# Altium PCB PCB1.PcbDoc
Units mil, origin at the board's own origin, x right, y up, seen from the top; angles counter-clockwise.
Board outline 10955.05 x 6878.87 mil, 2 copper layers (Top Layer, Bottom Layer); 48 components, 34 nets, 262 pads, 8 vias.
Unrouted connection lines stored in the file: 2.
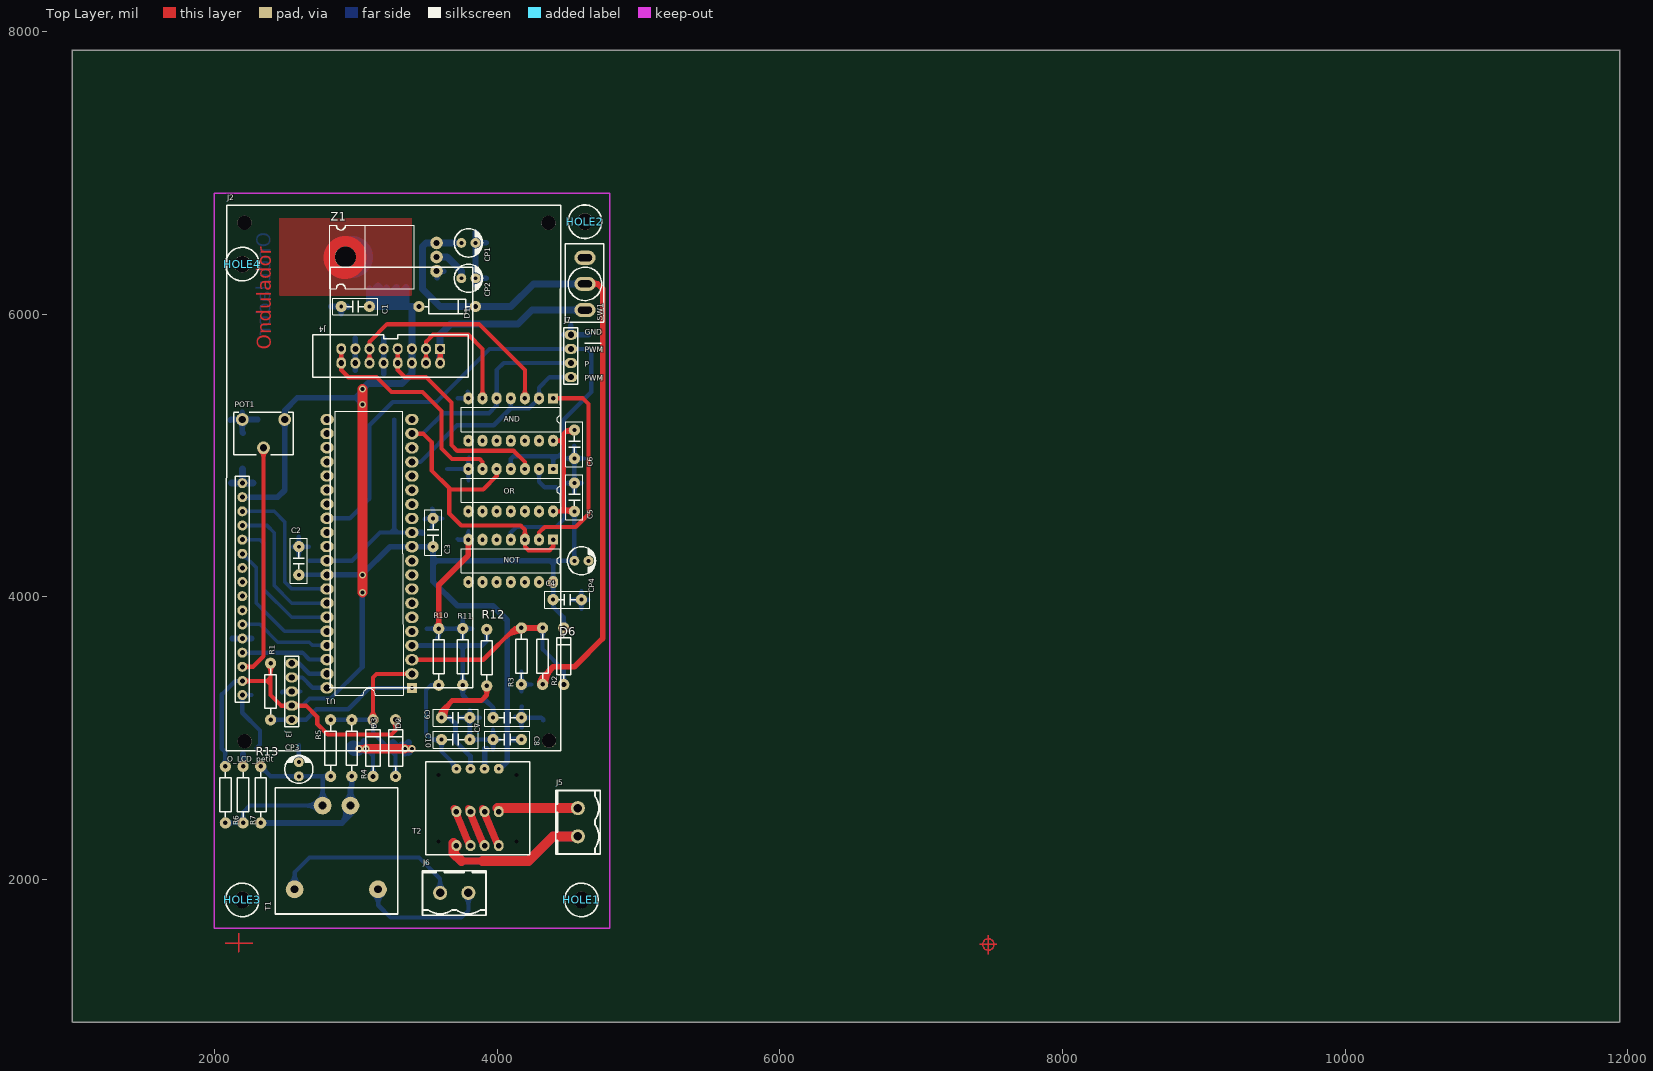
[diagram p0: Top Layer view]
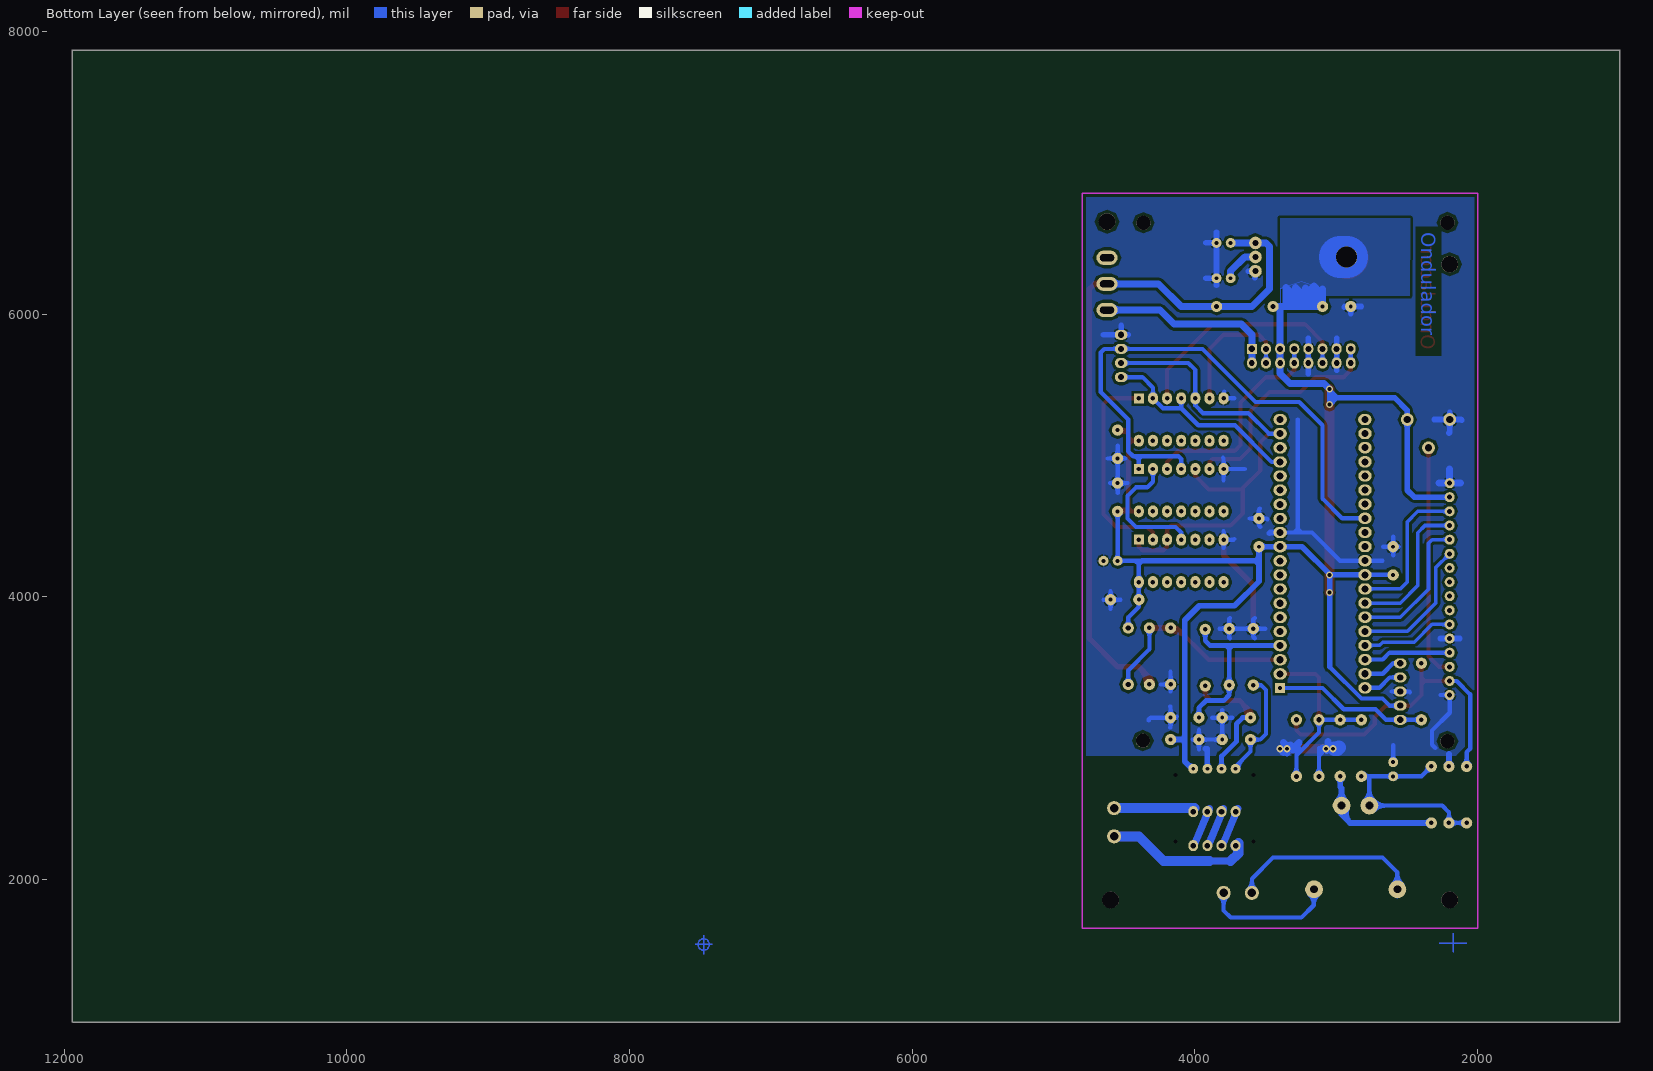
[diagram p1: Bottom Layer view, seen from below]

## Layer stack, top to bottom
Top Solder: solder mask 0.4, Solder Resist, Dk 3.5
Top Layer: signal copper 1.4
Dielectric 1: dielectric 12.6, FR-4, Dk 4.8
Bottom Layer: signal copper 1.4
Bottom Solder: solder mask 0.4, Solder Resist, Dk 3.5

## Board outline
991.18,996.73 cw(c994.98,1000) 989.97,1000 989.97,7865 cw(c994.98,7865) 994.98,7870.02 11940,7870.02 cw(c11940,7865) 11945.01,7865 11945.01,996.16 cw(c11940,996.16) 11940,991.15 996.16,991.15 cw(c996.16,996.16)

## Design rules (kind name [scope] priority, off if disabled: settings)
Clearance [All] p1: gap=20
PolygonConnect [All] p1: connectstyle=Relief reliefconductorwidth=10 reliefentries=4 polygonreliefangle="90 Angle" airgapwidth=10
RoutingVias [All] p1: holewidth=28 width=50 viastyle="Through Hole" minholewidth=28 minwidth=50 maxholewidth=28 maxwidth=50
SolderMaskExpansion [All] p1: expansion=4
UnpouredPolygon [All] p1: allowunpoured=FALSE
Width [All] p1: maxlimit=300 minlimit=15 preferedwidth=35
29 further rules are at their usual default settings.

## Classes and differential pairs
component class Sheet1: AND C1 C2 C3 C4 C5 C6 CP1 CP2 CP3 CP4 D1 D2 D3 D6 HOLE1 HOLE2 HOLE3 HOLE4 J2 J3 J4 J5 J6 J7 NOT OR POT1 R1 R2 R3 R4 R5 R6 R7 R10 R11 R12 SW1 T1 T2 U1 Z1

## Components (designator, comment, footprint, x,y, rotation, side; value= is the part's Value field where it differs from the comment)
AND "I-7408" DIP14 4395,5405 r270 top
C1 "C" C2_200MILS 3095,6055 r180 top
C2 "C" C2_200MILS 2595,4155 r90 top
C3 "C" C2_200MILS 3545,4355 r90 top
C4 "C" C2_200MILS 4395,3980 r0 top
C5 "C" C2_200MILS 4545,4605 r90 top
C6 "C" C2_200MILS 4545,5180 r270 top
C7 "C" C2_200MILS 3970,3145 r0 top
C8 "47nF" C2_200MILS 4170,2990 r180 top
C9 "4.7nF" C2_200MILS 3805,3145 r180 top
C10 "47nF" C2_200MILS 3605,2990 r0 top
CP1 "CP" CP1_D5I5 3745,6505 r0 top
CP2 "CP" CP1_D5I5 3745,6255 r0 top
CP3 "CP" CP1_D5I5 2595,2730 r90 top
CP4 "CP" CP1_D5I5 4545,4255 r0 top
D1 "D" DO41 3445,6055 r0 top
D2 "D" DO41 3280,2730 r90 top
D3 "D" DO41 3120,2730 r90 top
D6 "D" DO41 4470,3380 r90 top
HOLE1 "HOLE" HOLE3_D6 4595,1855 r90 top
HOLE2 "HOLE" HOLE3_D6 4620,6655 r90 top
HOLE3 "HOLE" HOLE3_D6 2195,1855 r90 top
HOLE4 "HOLE" HOLE3_D6 2195,6355 r90 top
J2 "O_LCD_petit" O_LCDPETIT 2195,3305 r90 top locked
J3 "ICSP" CON5_2I54V 2545,3130 r180 top
J4 "CON16_2headers" CON16-2HEADERS 3595,5755 r270 top
J5 "CON2" CON2_5I08V_CP 4570,2505 r270 top
J6 "CON2" CON2_5I08V_CP 3795,1905 r180 top
J7 "CON4" CON4_2I54V 4520,5555 r180 top
NOT "I-7404" DIP14 4395,4405 r270 top
OR "I-7432" DIP14 4395,4905 r270 top
POT1 "10k" PT15V 2495,5255 r180 top
R1 "10k" R1/4 2395,3530 r270 top
R2 "R" R1/4 4320,3380 r90 top
R3 "R" R1/4 4170,3780 r270 top
R4 "120k" R1/4 2970,2730 r90 top
R5 "5k6" R1/4 2820,3130 r270 top
R6 "1k" R1/4 2075,2800 r270 top
R7 "1k" R1/4 2200,2400 r90 top
R10 "220k" R1/4 3585,3775 r270 top
R11 "10k" R1/4 3755,3775 r270 top
R12 "10ohm" R1/4 3925,3770 r270 top
R13 "820ohm" R1/4 2325,2800 r270 top
SW1 "SW" SW1SPDT 4620,6030 r90 top
T1 "TRAFO_1P2S" TR_0.35/1/12 3295,1755 r90 top
T2 "Transducer 5-20A" "HXS 20-NP" 3710,2240 r0 top
U1 "I-PIC18F44K20" DIP40 3395,3355 r180 top
Z1 "Z-78MXX" TO220GDS_pla 3570,6505 r90 top

## Footprints (in the part's own frame and the unit in brackets; to place one, negate y for a bottom-side part, rotate by r counter-clockwise, add the part's x,y. Pads: shape width x height; smd on the part's side, far side on the other; paste and mask are expansions set on the pad)
C2_200MILS [mil]
  round 80 hole 27.56: 1(0,0) 2(200,0)
  silkscreen extent -60,-60 260,60
CON2_5I08V_CP [mm]
  round 2.54 hole 1.5: 1(0,0) 2(5.08,0)
  silkscreen extent -3.15,-4 8.24,4
CON4_2I54V [mm]
  oval 2.286x1.8 hole 1.1: 1(0,0) 2(0,-2.54) 3(0,-5.08) 4(0,-7.62)
  silkscreen extent -1.27,-8.89 1.27,1.27
CON5_2I54V [mm]
  oval 2.286x1.8 hole 1.1: 1(0,0) 2(0,-2.54) 3(0,-5.08) 4(0,-7.62) 5(0,-10.16)
  silkscreen extent -1.27,-11.43 1.27,1.27
CON16-2HEADERS [mil]
  rect 70.87x70.87 hole 47.24: 1(0,0)
  oval 80x70 hole 40: 2(100,0) 4(100,-100) 6(100,-200) 8(100,-300) 10(100,-400) 12(100,-500) 14(100,-600) 15(0,-700) 16(100,-700)
  oval 80x70.87 hole 43.31: 3(0,-100) 5(0,-200) 7(0,-300) 9(0,-400) 11(0,-500) 13(0,-600)
  silkscreen extent -100,-900 200,200
CP1_D5I5 [mil]
  round 70 hole 27.56: 1(0,0) 2(100,0)
  silkscreen extent -50,-100 150,100
DIP14 [mm]
  rect 1.8x1.8 hole 0.8: 1(0,0)
  oval 2.159x1.8 hole 0.8: 2(0,-2.54) 3(0,-5.08) 4(0,-7.62) 5(0,-10.16) 6(0,-12.7) 7(0,-15.24) 8(7.62,-15.24) 9(7.62,-12.7) 10(7.62,-10.16) 11(7.62,-7.62) 12(7.62,-5.08) 13(7.62,-2.54) 14(7.62,0)
  silkscreen extent 1.63,-16.51 5.99,1.27
DIP40 [mm]
  rect 1.8x1.8 hole 0.7: 1(0,0)
  oval 2.413x2.032 hole 1.27: 2(0,-2.54) 3(0,-5.08) 4(0,-7.62) 5(0,-10.16) 6(0,-12.7) 7(0,-15.24) 8(0,-17.78) 9(0,-20.32) 10(0,-22.86) 11(0,-25.4) 12(0,-27.94) 13(0,-30.48) 14(0,-33.02) 15(0,-35.56) 16(0,-38.1) 17(0,-40.64) 18(0,-43.18) 19(0,-45.72) 20(0,-48.26) 21(15.24,-48.26) 22(15.255,-45.745) 23(15.255,-43.205) 24(15.255,-40.665) 25(15.255,-38.125) 26(15.255,-35.585) 27(15.255,-33.045) 28(15.255,-30.505) 29(15.255,-27.965) 30(15.255,-25.425) 31(15.255,-22.885) 32(15.255,-20.345) 33(15.255,-17.805) 34(15.255,-15.265) 35(15.255,-12.725) 36(15.255,-10.185) 37(15.255,-7.645) 38(15.255,-5.105) 39(15.255,-2.565) 40(15.255,-0.025)
  round 1.8 hole 0.7: 2(0,-2.54) 3(0,-5.08) 4(0,-7.62) 5(0,-10.16) 6(0,-12.7) 7(0,-15.24) 8(0,-17.78) 9(0,-20.32) 10(0,-22.86) 11(0,-25.4) 12(0,-27.94) 13(0,-30.48) 14(0,-33.02) 15(0,-35.56) 16(0,-38.1) 17(0,-40.64) 18(0,-43.18) 19(0,-45.72) 20(0,-48.26) 21(15.24,-48.26) 22(15.255,-45.745) 23(15.255,-43.205) 24(15.255,-40.665) 25(15.255,-38.125) 26(15.255,-35.585) 27(15.255,-33.045) 28(15.255,-30.505) 29(15.255,-27.965) 30(15.255,-25.425) 31(15.255,-22.885) 32(15.255,-20.345) 33(15.255,-17.805) 34(15.255,-15.265) 35(15.255,-12.725) 36(15.255,-10.185) 37(15.255,-7.645) 38(15.255,-5.105) 39(15.255,-2.565) 40(15.255,-0.025)
  silkscreen extent 1.58,-49.75 13.78,1.28
DO41 [mil]
  round 80 hole 36: 1(0,0) 2(400,0)
  silkscreen extent 40,-50 360,50
HOLE3_D6 [mm]
  round 3 hole 3 unplated: 1(0,0)
  silkscreen extent -3.02,-3.02 3.02,3.01
"HXS 20-NP" [mm]
  round 0 hole 0.7: 0(-3.19,0.7) 0(-3.19,12.7) 0(10.81,0.7) 0(10.81,12.7)
  oval 1.778x2 hole 1: 1(0,0) 2(0,6.1) 3(2.54,0) 4(2.54,6.1) 5(5.08,0) 6(5.08,6.1) 7(7.62,0) 8(7.62,6.1)
  round 1.778 hole 0.7: 9(7.62,13.8) 10(5.08,13.8) 11(2.54,13.8) 12(0,13.8)
  silkscreen extent -5.54,-1.65 13.16,15.05
O_LCDPETIT [mm]
  round 2.54 hole 2.54 unplated: 0(-8.3,-0.425) 0(-8.2,-55.15) 0(84.9,-55.05) 0(84.915,-0.399)
  round 1.8 hole 0.9: 1(0,0) 2(2.54,0) 3(5.08,0) 4(7.62,0) 5(10.16,0) 6(12.7,0) 7(15.24,0) 8(17.78,0) 9(20.32,0) 10(22.86,0) 11(25.4,0) 12(27.94,0) 13(30.48,0) 14(33.02,0) 15(35.575,0) 16(38.1,0)
  silkscreen extent -10.05,-57.2 88.08,2.85
PT15V [mil]
  round 90 hole 51.18: 1(0,0) 2(150,200) 3(300,0)
  silkscreen extent -59,-51 360,248
R1/4 [mil]
  round 80 hole 32: 1(0,0) 2(400,0)
  silkscreen extent 40,-40 360,40
SW1SPDT [mil]
  oval 100x150 hole 50 slot 100 at 90 deg: 1(0,0) 2(185,0) 3(370,0)
  silkscreen extent -88,-133 470,138
TO220GDS_pla [mm]
  round 2.286 hole 1.1: 1(0,0) 2(-5.08,0) 3(-2.54,0)
  round 3.78 hole 3.78 unplated: 3(-2.54,16.4)
  silkscreen extent -8.2,4 3.16,19.2
TR_0.35/1/12 [mm]
  round 3.2 hole 1.4: 1(4.445,18.542) 2(19.501,13.5) 3(4.445,3.556) 4(19.501,8.5)
  silkscreen extent 0,0 22.7,22

## Part data
AND: "Cuadruple 2 input Schmitt trigger NAND gate"
C1 C2 C3 C4 C5 C6 C7: ";C?;C1206;C2_25x7i5;C4_15x5 ;C0805 ;Condensador baja potencia ;2"
C8 C9 C10: library part C, ";C?;C1206;C2_25x7i5;C4_15x5 ;C0805 ;Condensador baja potencia ;2"
CP1 CP2 CP3 CP4: ";CP? ;CP1_D5i5 ;CP2_D10i5 ;CP2_D13 ;CP4_D36 ;Condensador polarizado ;3"
D1 D2 D3 D6: ";D? ;SOD80;DO41 ;melf ;minimelf ; Diodo de señal o baja potencia ;8"
HOLE1 HOLE2 HOLE3 HOLE4: ";HOLE? ;HOLE3_D6 ; ; ;Agujero ;20"
J3: library part CON5, ";J? ;CON5 ;CON5_2i54VE_JST_B2PVH ;CON5_7I62_STL960-HG-3 ;CON5_2I54V;Conector de 5 pins simples ;17"
J4: ";J? ;CON5 ;CON5_2i54VE_JST_B2PVH ;CON5_7I62_STL960-HG-3 ;CON5_2I54V;Conector de 5 pins simples ;17"
J5 J6: ";J? ;CON2 ;CON2_2i54VE_JST_B2PVH ;CON2_7I62_STL960-HG-3 ;CON2_2I54V ;Conector de 2 pins simples ;17"
J7: ";J? ;CON4 ;CON4_2i54VE_JST_B2PVH ;CON4_7I62_STL960-HG-3 ;CON4_2I54V ;Conector de 4 pins simples ;17"
NOT: ";U? ;DIP-14 ; ; ; ;6xInversor trigger smith ;18"
OR: ";U? ;SOIC14 ; ; ; ; NOR x 4 ;18"
POT1: library part POT1, ";PT? ;PTV1 ;PT15V ;PTH ;PTH1 ;Potenciometro generico ;1"
R1 R4 R5 R6 R7 R10 R11 R12 R13: library part R, ";R? ;R1206 ;R1/4 ;R1/2 ;R0805 ;Resistencia baja potencia (<=1/2W) ;1"
R2 R3: ";R? ;R1206 ;R1/4 ;R1/2 ;R0805 ;Resistencia baja potencia (<=1/2W) ;1"
SW1: ";SW? ; ; ; ; ;Switch ;"
T1: ";T? ;TR-TOR1P-2S ; ; ; ;Transformador con 2 secundarios \"2part\" ;6"
Z1: ";Z? ;TO220 ;SOT233 ;TO220H_2COM ; ;Regulador Lineal ;11"

## Via types
v1: diameter 50, hole 28, Top Layer to Bottom Layer, 8 vias

## Nets (pads, with @x,y where several pads share a name; then routed paths per layer and width w, separated by ;. In a path a pad name is that pad's centre, name@x,y a point inside that pad or via, vN(x,y) a via of type N, cw(c..) or ccw(c..) an arc to the next point about the centre after c; other vN are vias at no path point)
+5V: AND.14 C1.1 C2.1 C3.1 C4.1 C5.1 C6.1 C8.1 CP2.1 CP4.1 D1.1 D2.2 D6.2 J2.2 J2.15 J3.2 J4.5 J4.6 NOT.14 OR.14 POT1.1 R1.1 R6.1 T2.9 U1.11 U1.32 Z1.3 | length 17728.6
  Top Layer w30: J2.2 2370,3405 ; J2.2@2209.45,3390.55 cw(c2244.33,3355.67) 2244.33,3405 cw(c2244.33,3454.33) J2.2@2209.45,3419.45 ; R1.1@2377.32,3512.32 cw(c2334.64,3469.64) 2395,3469.64 cw(c2455.36,3469.64) R1.1@2412.68,3512.32 ; R1.1 2395,3430 ; J3.2@2520.98,3215.55 ccw(c2486.1,3180.67) 2486.1,3230 ccw(c2486.1,3279.33) J3.2@2520.98,3244.45 ; J3.2@2569.02,3215.55 cw(c2603.9,3180.67) 2603.9,3230 cw(c2603.9,3279.33) J3.2@2569.02,3244.45 ; D2.2@3262.32,3112.32 cw(c3219.64,3069.64) 3280,3069.64 cw(c3340.36,3069.64) D2.2@3297.68,3112.32 ; D2.2 3280,3055 3250,3025 2800,3025 2725,3100 2725,3150 2645,3230 J3.2 2470,3230 2395,3305 2395,3380 ; OR.14 4445,4605 ; AND.14 4445,5105 ; C5.1@4525,4590 ccw(c4495,4567.5) 4495,4605 ; C5.1@4525,4620 cw(c4495,4642.5) 4495,4605 ; C6.1@4525,5165 ccw(c4495,5142.5) 4495,5180 ; C6.1@4525,5195 cw(c4495,5217.5) 4495,5180 ; C5.1@4530.32,4625.23 cw(c4502.95,4662.95) 4470,4630 ; C6.1@4530.32,5159.77 ccw(c4502.95,5122.05) 4470,5155 ; C5.1 4495,4605 ; C6.1 4495,5180 ; 2370,3405 2395,3430 ; 2370,3405 2395,3405 ; 2370,3405 2395,3380 ; 2395,3380 2395,3405 ; 2395,3405 2395,3430 ; 4445,4605 4495,4605 ; 4445,4605 4470,4630 ; 4445,5105 4470,5130 ; 4445,5105 4470,5080 ; 4470,4630 4470,5080 ; 4470,4630 4495,4605 ; 4470,5080 4470,5130 ; 4470,5130 4470,5155 ; 4470,5155 4495,5180
  Top Layer w40: v1@3045,4020 v1(3045,4030)
  Top Layer w70: v1(3045,4030) v1(3045,4155.98) v1(3045,5360) v1(3045,5470)
  Top Layer w300: Z1.3@2919.33,6400 Z1.3@2924.33,6405
  Bottom Layer w30: R6.1@2057.32,2817.68 ccw(c2014.64,2860.36) 2075,2860.36 ccw(c2135.36,2860.36) R6.1@2092.68,2817.68 ; R6.1@2075,2805 2075,2900 2050,2925 2050,3310 2145,3405 J2.2 ; J3.2 2620,3230 2670,3280 2820,3280 3045,3505 ; J3.2@2569.02,3215.55 cw(c2603.9,3180.67) 2603.9,3230 cw(c2603.9,3279.33) J3.2@2569.02,3244.45 ; C2.1 2595.98,4155.98 U1.32@2794.41,4155.98 ; U1.32@2779.96,4141.54 ccw(c2745.08,4106.65) 2745.08,4155.98 ccw(c2745.08,4205.31) U1.32@2779.96,4170.43 ; C4.1@4377.32,3997.68 ccw(c4334.64,4040.36) 4395,4040.36 ccw(c4455.36,4040.36) C4.1@4412.68,3997.68 ; NOT.14@4380.55,4083.48 cw(c4345.67,4048.6) 4395,4048.6 cw(c4444.33,4048.6) NOT.14@4409.45,4083.48 ; NOT.14@4380.55,4126.52 ccw(c4345.67,4161.4) 4395,4161.4 ccw(c4444.33,4161.4) NOT.14@4409.45,4126.52 ; D6.2@4452.32,3797.68 ccw(c4409.64,3840.36) 4470,3840.36 ccw(c4530.36,3840.36) D6.2@4487.68,3797.68 ; D6.2@4470,3805 4470,3855 4395,3930 C4.1 NOT.14 4395,4230 ; C5.1@4527.32,4587.32 cw(c4484.64,4544.64) 4545,4544.64 cw(c4605.36,4544.64) C5.1@4562.68,4587.32 ; CP4.1@4530.86,4240.86 ccw(c4496.72,4206.72) 4496.72,4255 ccw(c4496.72,4303.28) 4530.86,4269.14 ccw(c4496.72,4303.28) 4545,4303.28 ccw(c4593.28,4303.28) CP4.1@4559.14,4269.14 ; C5.1 CP4.1 4420,4255 ; 4395,4230 4420,4255 ; 4395,4230 4370,4255 4420,4255
  Bottom Layer w40: J2.15 2445.59,4705.59 2495,4755 POT1.1 2495,5320 2585,5410 2995,5410 ; J2.15@2205.91,4694.68 cw(c2232.26,4668.33) 2232.26,4705.59 cw(c2232.26,4742.85) J2.15@2205.91,4716.5 ; POT1.1@2477.32,5237.32 cw(c2434.64,5194.64) 2495,5194.64 cw(c2555.36,5194.64) POT1.1@2512.68,5237.32 ; U1.32@2794.41,4155.98 v1(3045,4155.98) 3045,3505 ; U1.32@2805.32,4145.07 cw(c2831.67,4118.73) 2831.67,4155.98 cw(c2831.67,4193.24) U1.32@2805.32,4166.9 ; v1@3042.99,4157.99 3240,4355 3395,4355 C3.1 3545,4280 ; v1(3045,5470) v1@3045,5460 ; U1.11@3384.09,4344.09 ccw(c3357.74,4317.74) 3357.74,4355 ccw(c3357.74,4392.26) U1.11@3384.09,4365.91 ; U1.11@3405.91,4344.09 cw(c3432.26,4317.74) 3432.26,4355 cw(c3432.26,4392.26) U1.11@3405.91,4365.91 ; C3.1@3530.86,4369.14 cw(c3496.72,4403.28) 3496.72,4355 cw(c3496.72,4306.72) 3530.86,4340.86 cw(c3496.72,4306.72) 3545,4306.72 cw(c3593.28,4306.72) C3.1@3559.14,4340.86 ; T2.9 4018.31,2783.31 4070,2835 4070,2970 ; T2.9@4010,2798.31 ccw(c4010,2854.58) 4049.79,2814.79 ; C8.1@4155.86,2975.86 ccw(c4121.72,2941.72) 4121.72,2990 ccw(c4121.72,3038.28) C8.1@4155.86,3004.14 ; C8.1 4090,2990 ; 4370,4255 3570,4255 ; 2995,5410 v1(3045,5360) 3045,5410 ; 2995,5410 3045,5410 ; 2995,5410 v1@3045,5460 ; 3045,5410 v1@3045,5460 ; 3545,4230 3570,4255 ; 3545,4230 3545,4255 ; 3545,4230 3545,4110 3717.5,3937.5 3967.5,3937.5 4070,3835 4070,3010 ; 3545,4255 3570,4255 ; 3545,4255 3545,4280 ; 3545,4280 3570,4255 ; 4070,2970 4090,2990 ; 4070,2970 4070,3010 ; 4070,3010 4090,2990
  Bottom Layer w50: v1(3045,5470) 3085,5510 3325,5510 3395,5580 J4.6 J4.5 3395,6055 ; 3095,6180 C1.1 3140,6055 ; C1.1@3100,6069.14 ccw(c3122.43,6132.57) 3170,6085 ; 3170,6180 3170,6185 3155,6200 3140,6185 3140,6055 ; D1.1 3395,6055 ; Z1.3@3570,6405 3645,6405 3745,6305 CP2.1 ; 3140,6055 3235,6055 ; 3140,6055 3170,6085 ; 3170,6085 3170,6140 3215,6185 3215,6075 3235,6055 ; 3235,6055 3305,6055 ; 3235,6055 3235,6140 3285,6190 3285,6075 3305,6055 ; 3305,6055 3355,6055 ; 3305,6055 3305,6140 3355,6190 3355,6055 ; 3355,6055 3395,6055
  Bottom Layer w300: Z1.3@2924.33,6405 Z1.3@2970,6405
+12SW: CP1.1 D1.2 R2.1 SW1.2 Z1.1 | length 5437.1
  Top Layer w40: R2.1@4300,3380 cw(c4372.43,3380) 4321.21,3431.21 ; R2.1 4320,3430 4395,3505 4545,3505 4745,3705 4745,6180 4710,6215 ; R2.1@4340,3380 cw(c4508.99,3380) 4389.5,3499.5 ; SW1.2 4710,6215 ; SW1.2@4667.83,6195.54 cw(c4710,6159.59) 4710,6215 ; SW1.2@4667.83,6234.46 ccw(c4710,6270.41) 4710,6215
  Bottom Layer w50: CP1.1 Z1.1 3495,6505 3470,6480 3470,6180 3595,6055 3720.59,6055 4095,6055 4255,6215 SW1.2 ; SW1.2@4577.32,6197.32 ccw(c4534.64,6154.64) 4534.64,6215 ccw(c4534.64,6275.36) SW1.2@4577.32,6232.68
+12V: J4.1 J4.2 SW1.1 | length 1549.2
  Top Layer w40: J4.2@3584.39,5670.61 ccw(c3558.79,5696.21) 3595,5696.21 ccw(c3631.21,5696.21) J4.2@3605.61,5670.61 ; J4.2 J4.1
  Bottom Layer w40: J4.2 J4.2@3595,5676.21
  Bottom Layer w50: J4.2@3595,5676.21 J4.1 3595,5855 3670,5930 4145,5930 4245,6030 SW1.1 ; SW1.1@4577.32,6012.32 ccw(c4534.64,5969.64) 4534.64,6030 ccw(c4534.64,6090.36) SW1.1@4577.32,6047.68
A: AND.6 J4.3 J4.4 | length 1291.3
  Top Layer w30: J4.4@3480.86,5674.14 ccw(c3446.72,5708.28) 3495,5708.28 ccw(c3543.28,5708.28) J4.4@3509.14,5674.14 ; J4.4 J4.3 3495,5805 3545,5855 3795,5855 3895,5755 AND.6 ; AND.6@3880.55,5426.52 ccw(c3845.67,5461.4) 3895,5461.4 ccw(c3944.33,5461.4) AND.6@3909.45,5426.52
  Bottom Layer w30: J4.4@3480.86,5674.14 ccw(c3446.72,5708.28) 3495,5708.28 ccw(c3543.28,5708.28) J4.4@3509.14,5674.14 ; J4.4 J4.3
AN12V: D6.1 R2.2 R3.1 U1.3 | length 2107.7
  Top Layer w30: U1.3@3395,3555 3900,3555 4125,3780 R3.1 ; U1.3@3409.45,3540.55 cw(c3444.33,3505.67) 3444.33,3555 cw(c3444.33,3604.33) U1.3@3409.45,3569.45 ; 4050.5,3705.5 cw(c4170,3586.01) R3.1@4170,3755 ; 4101.72,3756.72 cw(c4170,3688.43) R3.1@4170,3785
  Top Layer w40: R3.1 R2.2 ; R3.1@4184.14,3765.86 cw(c4218.28,3731.72) 4218.28,3780 cw(c4218.28,3828.28) R3.1@4184.14,3794.14 ; R2.2@4305.86,3765.86 ccw(c4271.72,3731.72) 4271.72,3780 ccw(c4271.72,3828.28) R2.2@4305.86,3794.14
  Bottom Layer w30: R2.2@4302.32,3762.32 cw(c4259.64,3719.64) 4320,3719.64 cw(c4380.36,3719.64) R2.2@4337.68,3762.32 ; R2.2 4320,3630 4470,3480 D6.1 ; D6.1@4452.32,3397.68 ccw(c4409.64,3440.36) 4470,3440.36 ccw(c4530.36,3440.36) D6.1@4487.68,3397.68
AN230: D2.1 D3.2 R4.2 R5.1 U1.2 | length 1713.8
  Top Layer w30: D3.2@3102.32,3147.68 ccw(c3059.64,3190.36) 3120,3190.36 ccw(c3180.36,3190.36) D3.2@3137.68,3147.68 ; D3.2@3120,3130.59 3120,3430 3145,3455 U1.2@3395,3455 ; U1.2@3380.55,3440.55 ccw(c3345.67,3405.67) 3345.67,3455 ccw(c3345.67,3504.33) U1.2@3380.55,3469.45
  Bottom Layer w30: R5.1 2840.71,3130 2841.3,3130.59 3120,3130.59 3120,3044.33 ; D3.2@3102.32,3112.32 cw(c3059.64,3069.64) 3120,3069.64 cw(c3180.36,3069.64) D3.2@3137.68,3112.32 ; 3120,3039.33 3280,2879.33 ; D2.1@3262.32,2747.68 ccw(c3219.64,2790.36) 3280,2790.36 ccw(c3340.36,2790.36) D2.1@3297.68,2747.68 ; D2.1 3280,2884.33
B: J4.15 J4.16 OR.6 | length 1876.2
  Top Layer w30: J4.16@2880.86,5674.14 ccw(c2846.72,5708.28) 2895,5708.28 ccw(c2943.28,5708.28) J4.16@2909.14,5674.14 ; J4.15 J4.16 2895,5605 2945,5555 3145,5555 3250,5450 3470,5450 3605,5315 3605,5050 3679.57,4975.43 3824.17,4975.43 3824.61,4975 3875,4975 3895,4955 OR.6
  Bottom Layer w30: J4.16@2880.86,5674.14 ccw(c2846.72,5708.28) 2895,5708.28 ccw(c2943.28,5708.28) J4.16@2909.14,5674.14 ; J4.16 J4.15
C: AND.3 J4.11 J4.12 | length 1940.6
  Top Layer w30: J4.12@3080.86,5674.14 ccw(c3046.72,5708.28) 3095,5708.28 ccw(c3143.28,5708.28) J4.12@3109.14,5674.14 ; J4.12 J4.11@3095,5730 ; J4.11 3095,5805 3220,5930 3870,5930 4195,5605 AND.3 ; AND.3@4180.55,5426.52 ccw(c4145.67,5461.4) 4195,5461.4 ccw(c4244.33,5461.4) AND.3@4209.45,5426.52
  Bottom Layer w30: J4.12@3080.86,5674.14 ccw(c3046.72,5708.28) 3095,5708.28 ccw(c3143.28,5708.28) J4.12@3109.14,5674.14 ; J4.12 J4.11
CONT: J2.3 POT1.2 | length 1847.3
  Top Layer w30: J2.3 2270,3505 2345,3580 POT1.2 ; J2.3@2209.45,3490.55 cw(c2244.33,3455.67) 2244.33,3505 cw(c2244.33,3554.33) J2.3@2209.45,3519.45 ; POT1.2@2323.79,5033.79 cw(c2272.57,4982.57) 2345,4982.57 cw(c2417.43,4982.57) POT1.2@2366.21,5033.79
D: J4.7 J4.8 OR.3 | length 1797.3
  Top Layer w30: J4.8@3280.86,5674.14 ccw(c3246.72,5708.28) 3295,5708.28 ccw(c3343.28,5708.28) J4.8@3309.14,5674.14 ; J4.7 J4.8 3295,5605 3345,5555 3495,5555 3675,5375 3675,5075 3715.43,5034.57 3824.17,5034.57 ; 3824.61,5035 3824.17,5034.57 ; OR.3 4195,4955 4115.43,5034.57 3824.17,5034.57
  Bottom Layer w30: J4.8@3280.86,5674.14 ccw(c3246.72,5708.28) 3295,5708.28 ccw(c3343.28,5708.28) J4.8@3309.14,5674.14 ; J4.8 J4.7
D0: J2.14 U1.33 | length 1249.7
  Bottom Layer w25: J2.14 2420,4605 2495,4530 2495,4105 2544.02,4055.98 U1.33@2794.41,4055.98 ; J2.14@2211.22,4588.78 cw(c2250.37,4549.63) 2250.37,4605 cw(c2250.37,4660.37) J2.14@2211.22,4621.22 ; U1.33@2778.19,4039.77 ccw(c2739.04,4000.62) 2739.04,4055.98 ccw(c2739.04,4111.35) U1.33@2778.19,4072.2
D1: J2.13 U1.34 | length 1221
  Bottom Layer w25: J2.13 2370,4505 2420,4455 2420,4080 2544.02,3955.98 U1.34@2795,3955.98 ; J2.13@2211.22,4488.78 cw(c2250.37,4449.63) 2250.37,4505 cw(c2250.37,4560.37) J2.13@2211.22,4521.22 ; U1.34@2778.19,3939.77 ccw(c2739.04,3900.62) 2739.04,3955.98 ccw(c2739.04,4011.35) U1.34@2778.19,3972.2
D2: J2.12 U1.35 | length 1191.1
  Bottom Layer w25: J2.12 2320,4405 2345,4380 2345,4055 2544.02,3855.98 U1.35@2794.41,3855.98 ; J2.12@2211.22,4388.78 cw(c2250.37,4349.63) 2250.37,4405 cw(c2250.37,4460.37) J2.12@2211.22,4421.22 ; U1.35@2778.19,3839.77 ccw(c2739.04,3800.62) 2739.04,3855.98 ccw(c2739.04,3911.35) U1.35@2778.19,3872.2
D3: J2.11 U1.36 | length 1147.2
  Bottom Layer w25: J2.11@2195,4282.07 cw(c2195,4226.7) 2234.15,4265.85 cw(c2273.3,4305) J2.11@2217.93,4305 ; J2.11 2295,4205 2295,3955 2494.02,3755.98 U1.36@2794.41,3755.98 ; U1.36@2778.19,3739.77 ccw(c2739.04,3700.62) 2739.04,3755.98 ccw(c2739.04,3811.35) U1.36@2778.19,3772.2
E: J2.6 U1.37 | length 835.1
  Bottom Layer w25: J2.6 2320,3805 2445,3680 2670,3680 2694.02,3655.98 U1.37@2794.41,3655.98 ; J2.6@2211.22,3788.78 cw(c2250.37,3749.63) 2250.37,3805 cw(c2250.37,3860.37) J2.6@2211.22,3821.22 ; U1.37@2778.19,3639.77 ccw(c2739.04,3600.62) 2739.04,3655.98 ccw(c2739.04,3711.35) U1.37@2778.19,3672.2
GND: AND.7 C1.2 C2.2 C3.2 C4.2 C5.2 C6.2 C7.2 C8.2 C9.1 C10.2 CP1.2 CP2.2 CP3.2 CP4.2 D3.1 J2.1 J2.5 J2.16 J3.3 J4.9 J4.10 J4.13 J4.14 J7.4 NOT.7 OR.7 POT1.3 R3.2 R7.2 R10.1 R11.1 T2.10 U1.12 U1.31 Z1.2 | length 17927.6
  Top Layer w40: R10.1@3570.86,3789.14 ccw(c3536.72,3823.28) 3585,3823.28 ccw(c3633.28,3823.28) R10.1@3599.14,3789.14 ; R10.1 3585,4085 3795,4295 NOT.7 ; NOT.7@3784.09,4387.02 cw(c3757.74,4360.67) 3795,4360.67 cw(c3832.26,4360.67) NOT.7@3805.91,4387.02
  Top Layer w50: v1(3020,2925) v1(3070,2925) ; v1(3345,2925) v1(3395,2925)
  Top Layer w70: v1(3070,2925) v1(3345,2925)
  Bottom Layer w30: J2.1@2180.55,3290.55 cw(c2145.67,3255.67) 2195,3255.67 cw(c2244.33,3255.67) 2209.45,3290.55 cw(c2244.33,3255.67) 2244.33,3305 cw(c2244.33,3354.33) J2.1@2209.45,3319.45 ; 2260,3305 J2.1 2195,3180 2320,3055 2320,2953.27 2296.73,2930 ; 2475,3325 2480,3330 J3.3 2605,3330 ; J3.3@2520.98,3315.55 ccw(c2486.1,3280.67) 2486.1,3330 ccw(c2486.1,3379.33) J3.3@2520.98,3344.45 ; J3.3@2569.02,3315.55 cw(c2603.9,3280.67) 2603.9,3330 cw(c2603.9,3379.33) J3.3@2569.02,3344.45 ; C2.2@2572.93,4343.25 ccw(c2553.36,4332.83) 2553.36,4355 ; C2.2@2572.93,4366.75 cw(c2553.36,4377.17) 2553.36,4355 ; C2.2@2577.32,4372.68 ccw(c2534.64,4415.36) 2595,4415.36 ccw(c2655.36,4415.36) 2612.68,4372.68 ccw(c2655.36,4415.36) 2655.36,4355 ccw(c2655.36,4294.64) C2.2@2612.68,4337.32 ; C2.2@2577.4,4337.25 cw(c2535.51,4295) 2595,4295 ; CP3.2@2580.86,2844.14 ccw(c2546.72,2878.28) 2595,2878.28 ccw(c2643.28,2878.28) CP3.2@2609.14,2844.14 ; CP3.2 2595,2950 ; 2595,4425 C2.2 ; C2.2@2612.6,4337.25 ccw(c2654.49,4295) 2595,4295 ; 2665,4355 C2.2 ; 2670.98,4255.98 2970.98,4255.98 3170,4455 3245,4455 ; U1.31@2779.96,4241.54 ccw(c2745.08,4206.65) 2745.08,4255.98 ccw(c2745.08,4305.31) U1.31@2779.96,4270.43 ; U1.31@2808.86,4241.54 cw(c2843.74,4206.65) 2843.74,4255.98 cw(c2843.74,4305.31) U1.31@2808.86,4270.43 ; 3094.74,2929.74 3094.74,2900.26 3120,2875 ; D3.1@3102.32,2747.68 ccw(c3059.64,2790.36) 3120,2790.36 ccw(c3180.36,2790.36) D3.1@3137.68,2747.68 ; D3.1 3120,2930 ; 3270,5255 3270,4480 ; U1.12@3380.55,4440.55 ccw(c3345.67,4405.67) 3345.67,4455 ccw(c3345.67,4504.33) U1.12@3380.55,4469.45 ; U1.12@3395,4455 3295,4455 ; 3485,4550 3490,4555 ; 3500,3775 R10.1 ; C3.2@3526.16,4538.56 ccw(c3490,4507.01) 3490,4555 ; C3.2@3526.16,4571.44 cw(c3490,4602.99) 3490,4555 ; C3.2@3527.32,4572.68 ccw(c3484.64,4615.36) 3545,4615.36 ccw(c3605.36,4615.36) 3562.68,4572.68 ccw(c3605.36,4615.36) 3605.36,4555 ccw(c3605.36,4494.64) C3.2@3562.68,4537.32 ; C3.2@3530,4535 cw(c3507.5,4505) 3545,4505 ; 3535,4495 3545,4505 ; C3.2@3540,4550 C3.2 ; 3540,4625 3545,4620 C3.2 ; C3.2@3560,4535 ccw(c3582.5,4505) 3545,4505 ; R10.1@3567.32,3757.32 ccw(c3524.64,3714.64) 3524.64,3775 ccw(c3524.64,3835.36) 3567.32,3792.68 ccw(c3524.64,3835.36) 3585,3835.36 ccw(c3645.36,3835.36) 3602.68,3792.68 ccw(c3645.36,3835.36) 3645.36,3775 ccw(c3645.36,3714.64) R10.1@3602.68,3757.32 ; R10.1@3567.95,3756.72 cw(c3531.38,3717.5) 3585,3717.5 ; 3575,3707.5 3585,3717.5 ; 3575,3850 3585,3840 R10.1 ; R10.1@3602.05,3756.72 ccw(c3638.62,3717.5) 3585,3717.5 ; 3610,4555 C3.2 ; 3645,4905 OR.7 ; 3720,4410 3725,4405 NOT.7 ; 3720,5405 AND.7 3795,5447.11 3790,5452.11 ; 3734.25,3145 C9.1 ; 3750,3707.5 3755,3712.5 R11.1 ; 3750,3850 3755,3845 R11.1 ; NOT.7@3780.55,4383.48 cw(c3745.67,4348.6) 3795,4348.6 cw(c3844.33,4348.6) NOT.7@3809.45,4383.48 ; NOT.7@3780.55,4390.55 ccw(c3745.67,4355.67) 3745.67,4405 ccw(c3745.67,4454.33) NOT.7@3780.55,4419.45 ; NOT.7@3780.55,4426.52 ccw(c3745.67,4461.4) 3795,4461.4 ccw(c3844.33,4461.4) NOT.7@3809.45,4426.52 ; OR.7@3780.55,4883.48 cw(c3745.67,4848.6) 3795,4848.6 cw(c3844.33,4848.6) OR.7@3809.45,4883.48 ; OR.7@3780.55,4890.55 ccw(c3745.67,4855.67) 3745.67,4905 ccw(c3745.67,4954.33) OR.7@3780.55,4919.45 ; OR.7@3780.55,4926.52 ccw(c3745.67,4961.4) 3795,4961.4 ccw(c3844.33,4961.4) OR.7@3809.45,4926.52 ; AND.7@3780.55,5390.55 ccw(c3745.67,5355.67) 3745.67,5405 ccw(c3745.67,5454.33) AND.7@3780.55,5419.45 ; C10.2@3787.32,3007.68 ccw(c3744.64,3050.36) 3805,3050.36 ccw(c3865.36,3050.36) 3822.68,3007.68 ccw(c3865.36,3050.36) 3865.36,2990 ccw(c3865.36,2929.64) C10.2@3822.68,2972.32 ; C9.1@3787.32,3162.68 cw(c3744.64,3205.36) 3744.64,3145 cw(c3744.64,3084.64) 3787.32,3127.32 cw(c3744.64,3084.64) 3805,3084.64 cw(c3865.36,3084.64) 3822.68,3127.32 cw(c3865.36,3084.64) 3865.36,3145 cw(c3865.36,3205.36) C9.1@3822.68,3162.68 ; C9.1@3788.56,3163.84 ccw(c3757.01,3200) 3805,3200 ; 3795,4345 NOT.7 ; 3795,4465 NOT.7 ; 3795,4825 OR.7 ; 3800,4985 3795,4980 OR.7 ; C9.1@3821.44,3163.84 cw(c3852.99,3200) 3805,3200 ; 3825,3775 R11.1 ; 3875,3145 C9.1 ; 3970,2920 C8.2 ; 3970,3060 C8.2 ; C8.2@3987.68,2972.32 ccw(c4030.36,2929.64) 3970,2929.64 ccw(c3909.64,2929.64) 3952.32,2972.32 ccw(c3909.64,2929.64) 3909.64,2990 ccw(c3909.64,3050.36) 3952.32,3007.68 ccw(c3909.64,3050.36) 3970,3050.36 ccw(c4030.36,3050.36) C8.2@3987.68,3007.68 ; C8.2@3991.23,2976.79 cw(c4015,2962) 4015,2990 ; C8.2@3991.23,3003.21 ccw(c4015,3018) 4015,2990 ; 4125,3150.83 4130.83,3145 C7.2 ; C7.2@4152.32,3127.32 cw(c4109.64,3084.64) 4170,3084.64 cw(c4230.36,3084.64) 4187.68,3127.32 cw(c4230.36,3084.64) 4230.36,3145 cw(c4230.36,3205.36) 4187.68,3162.68 cw(c4230.36,3205.36) 4170,3205.36 cw(c4109.64,3205.36) C7.2@4152.32,3162.68 ; R3.2@4152.32,3397.68 ccw(c4109.64,3440.36) 4170,3440.36 ccw(c4230.36,3440.36) 4187.68,3397.68 ccw(c4230.36,3440.36) 4230.36,3380 ccw(c4230.36,3319.64) R3.2@4187.68,3362.32 ; R3.2@4155,3360 cw(c4132.5,3330) 4170,3330 ; 4170,3470 R3.2 ; 4175,3075 cw(c4175,3080) 4170,3080 C7.2 ; 4175,3225 ccw(c4175,3220) 4170,3220 C7.2 ; R3.2@4185,3360 ccw(c4207.5,3330) 4170,3330 ; 4240,3380 R3.2 ; 4325,3125 ccw(c4305,3125) 4305,3145 C7.2 ; 4475,4805 C5.2 ; 4525,3980 C4.2 ; C6.2@4526,4963.75 ccw(c4490.71,4933.56) 4490.71,4980 ; C6.2@4526,4996.25 cw(c4490.71,5026.44) 4490.71,4980 ; C6.2@4527.32,4962.32 cw(c4484.64,4919.64) 4545,4919.64 cw(c4605.36,4919.64) 4562.68,4962.32 cw(c4605.36,4919.64) 4605.36,4980 cw(c4605.36,5040.36) 4562.68,4997.68 cw(c4605.36,5040.36) 4545,5040.36 cw(c4484.64,5040.36) C6.2@4527.32,4997.68 ; 4545,4735 C5.2 ; 4545,5070 C6.2 ; C5.2@4562.68,4787.32 ccw(c4605.36,4744.64) 4545,4744.64 ccw(c4484.64,4744.64) 4527.32,4787.32 ccw(c4484.64,4744.64) 4484.64,4805 ccw(c4484.64,4865.36) 4527.32,4822.68 ccw(c4484.64,4865.36) 4545,4865.36 ccw(c4605.36,4865.36) C5.2@4562.68,4822.68 ; C5.2@4563.84,4788.56 cw(c4600,4757.01) 4600,4805 ; C5.2@4563.84,4821.44 ccw(c4600,4852.99) 4600,4805 ; C4.2@4577.32,3997.68 cw(c4534.64,4040.36) 4534.64,3980 cw(c4534.64,3919.64) 4577.32,3962.32 cw(c4534.64,3919.64) 4595,3919.64 cw(c4655.36,3919.64) C4.2@4612.68,3962.32 ; C4.2@4577.4,3997.75 ccw(c4535.51,4040) 4595,4040 ; 4595,3915 C4.2 ; C4.2@4612.6,3997.75 cw(c4654.49,4040) 4595,4040 ; C4.2@4615,3965 cw(c4645,3942.5) 4645,3980 ; C4.2@4615,3995 ccw(c4645,4017.5) 4645,3980 ; 4615,4980 C6.2 ; 2553.36,4355 C2.2 ; 2595,4295 C2.2 ; 3245,4455 3295,4455 ; 3245,4455 3270,4480 ; 3270,4480 3295,4455 ; 3490,4555 C3.2 ; 3545,4505 C3.2 ; 3585,3717.5 R10.1 ; R10.1 R11.1 ; C9.1 C10.2 C8.2 ; C9.1 3805,3200 ; C8.2 4015,2990 ; 4170,3330 R3.2 ; 4490.71,4980 C6.2 ; C5.2 C6.2 ; C5.2 4600,4805 ; C4.2 4645,3980 ; C4.2 4595,4040 ; 3694.64,3775 cw(c3694.64,3714.64) 3737.32,3757.32 cw(c3694.64,3714.64) 3755,3714.64 cw(c3815.36,3714.64) 3772.68,3757.32 cw(c3815.36,3714.64) 3815.36,3775 cw(c3815.36,3835.36) 3772.68,3792.68 cw(c3815.36,3835.36) 3755,3835.36 cw(c3694.64,3835.36) 3737.32,3792.68 cw(c3694.64,3835.36) 3694.64,3775
  Bottom Layer w40: 2110,5250 2115,5255 POT1.3 ; 2125,3705 J2.5 2260,3705 ; POT1.3@2177.32,5272.68 cw(c2134.64,5315.36) 2134.64,5255 cw(c2134.64,5194.64) 2177.32,5237.32 cw(c2134.64,5194.64) 2195,5194.64 cw(c2255.36,5194.64) 2212.68,5237.32 cw(c2255.36,5194.64) 2255.36,5255 cw(c2255.36,5315.36) POT1.3@2212.68,5272.68 ; POT1.3@2180,5275 ccw(c2157.5,5305) 2195,5305 ; J2.5@2184.09,3694.09 ccw(c2157.74,3667.74) 2157.74,3705 ccw(c2157.74,3742.26) J2.5@2184.09,3715.91 ; R7.2@2185.86,2814.14 ccw(c2151.72,2848.28) 2200,2848.28 ccw(c2248.28,2848.28) R7.2@2214.14,2814.14 ; R7.2 2200,2888.23 ; 2200,5160 2195,5165 POT1.3 ; J2.5@2205.91,3694.09 cw(c2232.26,3667.74) 2232.26,3705 cw(c2232.26,3742.26) J2.5@2205.91,3715.91 ; POT1.3@2210,5275 cw(c2232.5,5305) 2195,5305 ; 2305,5255 POT1.3 ; 2820,6055 C1.2 ; C1.2@2880.86,6069.14 cw(c2846.72,6103.28) 2846.72,6055 cw(c2846.72,6006.72) 2880.86,6040.86 cw(c2846.72,6006.72) 2895,6006.72 cw(c2943.28,6006.72) C1.2@2909.14,6040.86 ; 2895,6005 C1.2 ; C1.2@2910.61,6042.5 cw(c2936.63,6021.67) 2936.63,6055 ; C1.2@2910.61,6067.5 ccw(c2936.63,6088.33) 2936.63,6055 ; 2941.64,6050 2936.64,6055 ; J4.13@2984.09,5770.48 ccw(c2957.74,5796.83) 2995,5796.83 ccw(c3032.26,5796.83) J4.13@3005.91,5770.48 ; J4.14@2984.39,5639.39 cw(c2958.79,5613.79) 2995,5613.79 cw(c3031.21,5613.79) J4.14@3005.61,5639.39 ; J4.14@2984.39,5670.61 ccw(c2958.79,5696.21) 2995,5696.21 ccw(c3031.21,5696.21) J4.14@3005.61,5670.61 ; 2995,5605 J4.14 J4.13 2995,5830 ; J4.9@3184.09,5770.48 ccw(c3157.74,5796.83) 3195,5796.83 ccw(c3232.26,5796.83) J4.9@3205.91,5770.48 ; J4.10@3184.39,5639.39 cw(c3158.79,5613.79) 3195,5613.79 cw(c3231.21,5613.79) J4.10@3205.61,5639.39 ; J4.10@3184.39,5670.61 ccw(c3158.79,5696.21) 3195,5696.21 ccw(c3231.21,5696.21) J4.10@3205.61,5670.61 ; 3195,5580 J4.10 J4.9 3195,5830 ; U1.12@3395,4455 3465,4455 3470,4450 ; U1.12@3405.91,4444.09 cw(c3432.26,4417.74) 3432.26,4455 cw(c3432.26,4492.26) U1.12@3405.91,4465.91 ; 3575,6257.89 3570,6262.89 Z1.2 3620,6305 ; Z1.2@3590,6290 cw(c3620,6267.5) 3620,6305 ; Z1.2@3590,6320 ccw(c3620,6342.5) 3620,6305 ; CP2.2@3834.39,6244.39 cw(c3808.79,6218.79) 3845,6218.79 cw(c3881.21,6218.79) 3855.61,6244.39 cw(c3881.21,6218.79) 3881.21,6255 cw(c3881.21,6291.21) 3855.61,6265.61 cw(c3881.21,6291.21) 3845,6291.21 cw(c3808.79,6291.21) CP2.2@3834.39,6265.61 ; CP1.2@3834.39,6494.39 cw(c3808.79,6468.79) 3845,6468.79 cw(c3881.21,6468.79) 3855.61,6494.39 cw(c3881.21,6468.79) 3881.21,6505 cw(c3881.21,6541.21) 3855.61,6515.61 cw(c3881.21,6541.21) 3845,6541.21 cw(c3808.79,6541.21) CP1.2@3834.39,6515.61 ; 3845,6205 CP2.2 ; 3845,6580 CP1.2 ; T2.10@3899.39,2793.91 ccw(c3873.79,2819.52) 3910,2819.52 ccw(c3946.21,2819.52) T2.10@3920.61,2793.91 ; T2.10 3910,2925 3925,2925 ; 3920,6255 CP2.2 ; 3920,6505 CP1.2 ; 4470,5855 J7.4 ; J7.4@4499.52,5844.09 ccw(c4473.17,5817.74) 4473.17,5855 ccw(c4473.17,5892.26) J7.4@4499.52,5865.91 ; J7.4@4509.09,5865.91 ccw(c4482.74,5892.26) 4520,5892.26 ccw(c4557.26,5892.26) J7.4@4530.91,5865.91 ; 4520,5920 J7.4 ; J7.4@4540.48,5844.09 cw(c4566.83,5817.74) 4566.83,5855 cw(c4566.83,5892.26) J7.4@4540.48,5865.91 ; 4645,5855 J7.4 ; POT1.3 2195,5305 ; C1.2 2936.64,6055 ; CP2.2 CP1.2
  Bottom Layer w50: 2120,4805 J2.16 ; 2195,4905 J2.16 ; 2270,4805 J2.16 ; v1@3010,2925 v1(3020,2925) v1(3070,2925) ; 3055,2975 3055,2940 v1(3070,2925) ; v1@3065,2914.19 3070,2919.19 v1(3070,2925) ; 3260,2970 3295,2935 3295,2925 ; 3272.02,2932.83 3287.17,2932.83 3295,2925 ; 3287.43,2917.43 3295,2925 ; 3305,2915 3295,2925 ; 3321.79,2951.79 3295,2925 ; 3345,2894.19 v1(3395,2925) ; v1(3345,2925) 3335,2925 v1@3345,2935 ; 3370,2970 3345,2945 v1@3345,2935 ; 3371.79,2898.21 v1(3395,2925) ; v1(3070,2925) 3075,2930 3094.48,2930 3094.74,2929.74 3090,2925 v1(3070,2925) ; v1@3345,2935 v1(3395,2925)
  Bottom Layer w100: 2980,2935 2990,2925 v1@3010,2925
IOUT: C9.2 R12.2 T2.11 | length 1300.7
  Top Layer w35: C9.2@3592.5,3145 cw(c3670.96,3145) 3615.48,3200.48 ; C9.2 3605,3190 3680,3265 3885,3265 3925,3305 R12.2 ; C9.2@3627.5,3145 cw(c3790.46,3145) 3675.23,3260.23 ; R12.2@3909.09,3354.09 cw(c3870.68,3315.68) 3925,3315.68 cw(c3979.32,3315.68) R12.2@3940.91,3354.09
  Bottom Layer w35: C9.2 3660,3145 3705,3100 3705,2975 3805,2875 3810,2875 T2.11 ; T2.11@3797.63,2795.68 ccw(c3767.75,2825.56) 3810,2825.56 ccw(c3852.25,2825.56) T2.11@3822.37,2795.68
MCLR: J3.1 R1.2 U1.1 | length 1343
  Bottom Layer w30: R1.2 J3.1 2645,3130 2720,3205 2945,3205 3095,3355 U1.1 ; R1.2@2412.68,3112.32 cw(c2455.36,3069.64) 2455.36,3130 cw(c2455.36,3190.36) R1.2@2412.68,3147.68 ; J3.1@2520.98,3115.55 ccw(c2486.1,3080.67) 2486.1,3130 ccw(c2486.1,3179.33) J3.1@2520.98,3144.45 ; J3.1@2569.02,3115.55 cw(c2603.9,3080.67) 2603.9,3130 cw(c2603.9,3179.33) J3.1@2569.02,3144.45
NetAND_1: AND.1 NOT.2 | length 1500.4
  Top Layer w30: NOT.2 4295,4455 4335,4495 4555,4495 4645,4585 4645,5365 4605,5405 AND.1
NetC7_1: C7.1 R11.2 R12.1 U1.4 | length 1742.7
  Bottom Layer w35: U1.4@3395,3655 3735,3655 ; U1.4@3407.68,3642.32 cw(c3438.29,3611.71) 3438.29,3655 cw(c3438.29,3698.29) U1.4@3407.68,3667.68 ; R11.2@3739.09,3359.09 cw(c3700.68,3320.68) 3755,3320.68 cw(c3809.32,3320.68) R11.2@3770.91,3359.09 ; R11.2@3739.09,3390.91 ccw(c3700.68,3429.32) 3755,3429.32 ccw(c3809.32,3429.32) R11.2@3770.91,3390.91 ; R12.1@3909.09,3754.09 cw(c3870.68,3715.68) 3925,3715.68 cw(c3979.32,3715.68) R12.1@3940.91,3754.09 ; R12.1 3925,3690 3890,3655 3775,3655 ; C7.1@3954.09,3160.91 ccw(c3915.68,3199.32) 3970,3199.32 ccw(c4024.32,3199.32) C7.1@3985.91,3160.91 ; C7.1 3970,3215 3920,3265 3795,3265 3755,3305 3755,3370 3755,3635 ; 3735,3655 3755,3635 ; 3735,3655 3775,3655 ; 3755,3635 3775,3655
NetCP3_1: CP3.1 R5.2 R6.2 R7.1 R13.1 T1.2 | length 2585.7
  Bottom Layer w30: R6.2 R7.1 2200,2475 2247.77,2522.77 T1.2 2763.5,2723.5 2770,2730 ; R6.2@2092.68,2382.32 cw(c2135.36,2339.64) 2135.36,2400 cw(c2135.36,2460.36) R6.2@2092.68,2417.68 ; R7.1@2182.32,2382.32 ccw(c2139.64,2339.64) 2139.64,2400 ccw(c2139.64,2460.36) 2182.32,2417.68 ccw(c2139.64,2460.36) 2200,2460.36 ccw(c2260.36,2460.36) R7.1@2217.68,2417.68 ; R13.1@2325,2775 cw(c2325,2714.64) 2367.68,2757.32 cw(c2410.36,2800) R13.1@2350,2800 ; R13.1 2395,2730 CP3.1 2770,2730 ; CP3.1@2580.86,2715.86 ccw(c2546.72,2681.72) 2546.72,2730 ccw(c2546.72,2778.28) CP3.1@2580.86,2744.14 ; CP3.1@2609.14,2715.86 cw(c2643.28,2681.72) 2643.28,2730 cw(c2643.28,2778.28) CP3.1@2609.14,2744.14 ; T1.2@2729.57,2488.83 ccw(c2647.64,2406.9) 2647.64,2522.77 ccw(c2647.64,2638.63) 2729.57,2556.7 ccw(c2647.64,2638.63) 2763.5,2638.63 ccw(c2879.37,2638.63) T1.2@2797.44,2556.7 ; R5.2@2800,2715 ccw(c2770,2692.5) 2770,2730 ; R5.2@2800,2745 cw(c2770,2767.5) 2770,2730 ; R5.2@2802.32,2712.32 ccw(c2759.64,2669.64) 2759.64,2730 ccw(c2759.64,2790.36) R5.2@2802.32,2747.68 ; R5.2@2813.5,2723.5 R5.2 2770,2730
NetJ5_1: J5.1 T2.8 | length 1141.7
  Top Layer w50: T2.8@3999.9,2506.75 T2.8@4001.65,2505
  Top Layer w70: T2.8@4001.65,2505 J5.1
  Bottom Layer w50: T2.8@3999.9,2506.75 T2.8@4001.65,2505
  Bottom Layer w70: T2.8@4001.65,2505 J5.1
NetJ5_2: J5.2 T2.1 | length 2307.5
  Top Layer w50: 3745,2130 3895,2130
  Top Layer w70: 3690.1,2187.59 cw(c3758.04,2187.59) T2.1@3710,2235.63 ; 3690.1,2196.33 cw(c3758.04,2196.33) T2.1@3710,2244.37 ; T2.1@3690.1,2256.79 3690.1,2184.9 3745,2130 ; 3895,2130 4220,2130 4395,2305 J5.2
  Bottom Layer w50: 3745,2130 3895,2130
  Bottom Layer w70: 3690.1,2187.59 cw(c3758.04,2187.59) T2.1@3710,2235.63 ; 3690.1,2196.33 cw(c3758.04,2196.33) T2.1@3710,2244.37 ; T2.1@3690.1,2256.79 3690.1,2184.9 3745,2130 ; 3895,2130 4220,2130 4395,2305 J5.2
NetJ6_1: J6.1 T1.3 | length 1187.2
  Bottom Layer w30: T1.3@3123.01,1894.22 cw(c3054.66,1817.78) 3157.2,1817.78 ; 3157.2,1819.46 cw(c3265.54,1819.46) T1.3@3188.94,1896.06 ; T1.3@3157.2,1881.03 3157.2,1817.8 ; J6.1@3770.25,1880.25 cw(c3710.5,1820.5) 3795,1820.5 cw(c3879.5,1820.5) J6.1@3819.75,1880.25 ; J6.1 3795,1780 3745,1730 3245,1730 3157.2,1817.8
NetJ6_2: J6.2 T1.1 | length 1718.6
  Bottom Layer w30: T1.1@2531.06,1963.94 ccw(c2445.14,2049.86) 2566.65,2049.86 ; T1.1@2566.65,1881.03 2566.65,2051.65 2670,2155 3445,2155 3595,2005 J6.2 ; 2566.65,2041.87 ccw(c2676.87,2041.87) T1.1@2598.94,1963.94 ; J6.2@3570.25,1929.75 ccw(c3510.5,1989.5) 3595,1989.5 ccw(c3679.5,1989.5) J6.2@3619.75,1929.75
NetNOT_4: NOT.4 OR.2 | length 1082.3
  Bottom Layer w30: NOT.4@4082.11,4427.92 ccw(c4060.12,4455) 4095,4455 ; NOT.4 4095,4455 ; NOT.4@4107.89,4427.92 cw(c4129.88,4455) 4095,4455 ; OR.2@4280.55,4883.48 cw(c4245.67,4848.6) 4295,4848.6 cw(c4344.33,4848.6) OR.2@4309.45,4883.48 ; OR.2 4295,4815 4335,4775 4415,4775 4475,4715 4475,4555 4415,4495 4135,4495 4095,4455
NetR4_1: R4.1 R13.2 T1.4 | length 1449.4
  Bottom Layer w40: R13.2 2900,2400 ; R13.2@2339.14,2385.86 cw(c2373.28,2351.72) 2373.28,2400 cw(c2373.28,2448.28) R13.2@2339.14,2414.14 ; T1.4@2920.74,2506.06 cw(c2831.57,2468.44) 2900,2400 ; T1.4@2929.95,2553.17 ccw(c2856.56,2626.56) 2960.35,2626.56 ccw(c3064.15,2626.56) T1.4@2990.75,2553.17 ; 2942.04,2442.04 ccw(c2890.7,2493.38) T1.4@2957.6,2521.6 ; R4.1@2955.86,2715.86 cw(c2921.72,2681.72) 2970,2681.72 cw(c3018.28,2681.72) R4.1@2984.14,2715.86 ; R4.1 2970,2655 2960.35,2645.35 T1.4 2960.35,2460.35 2900,2400
NPWM: J7.3 OR.1 OR.4 U1.28 | length 4372.3
  Bottom Layer w30: U1.28@2794.41,4555.98 2955.98,4555.98 3095,4695 3095,5215 3260,5380 3570,5380 3945,5755 4640,5755 4665,5730 4665,5450 4470,5255 4470,5030 4435,4995 4420,4995 ; U1.28@2808.86,4541.54 cw(c2843.74,4506.65) 2843.74,4555.98 cw(c2843.74,4605.31) U1.28@2808.86,4570.43 ; OR.4@4080.55,4926.52 ccw(c4045.67,4961.4) 4095,4961.4 ccw(c4144.33,4961.4) OR.4@4109.45,4926.52 ; OR.4 4095,4975 4115,4995 4375,4995 ; OR.1 4395,4975 ; J7.3@4495.98,5740.55 ccw(c4461.1,5705.67) 4461.1,5755 ccw(c4461.1,5804.33) J7.3@4495.98,5769.45 ; J7.3@4544.02,5740.55 cw(c4578.9,5705.67) 4578.9,5755 cw(c4578.9,5804.33) J7.3@4544.02,5769.45 ; 4375,4995 4420,4995 ; 4375,4995 4395,4975 ; 4395,4975 4400,4975 4420,4995
P: AND.5 J7.2 NOT.1 NOT.3 OR.5 U1.19 | length 4037.3
  Top Layer w30: U1.19@3395,5155 3475,5155 3535,5095 3535,4895 3660,4770 3660,4590 3745,4505 4165,4505 4195,4475 NOT.3 4195,4355 4220,4330 4370,4330 4395,4355 NOT.1 ; U1.19@3409.45,5140.55 cw(c3444.33,5105.67) 3444.33,5155 cw(c3444.33,5204.33) U1.19@3409.45,5169.45 ; 3670,4760 3900,4760 3995,4855 OR.5 ; NOT.3@4180.55,4426.52 ccw(c4145.67,4461.4) 4195,4461.4 ccw(c4244.33,4461.4) NOT.3@4209.45,4426.52
  Bottom Layer w30: U1.19@3395,5155 3475,5155 3620,5300 3940,5300 3995,5355 ; U1.19@3409.45,5140.55 cw(c3444.33,5105.67) 3444.33,5155 cw(c3444.33,5204.33) U1.19@3409.45,5169.45 ; AND.5@3980.55,5426.52 ccw(c3945.67,5461.4) 3995,5461.4 ccw(c4044.33,5461.4) AND.5@4009.45,5426.52 ; AND.5@3982.11,5382.08 cw(c3960.12,5355) 3995,5355 ; AND.5@4007.89,5382.08 ccw(c4029.88,5355) 3995,5355 ; J7.2@4495.98,5640.55 ccw(c4461.1,5605.67) 4461.1,5655 ccw(c4461.1,5704.33) J7.2@4495.98,5669.45 ; J7.2 4045,5655 3995,5605 AND.5 3995,5355
PGC: J3.5 U1.39 | length 357.6
  Bottom Layer w30: J3.5 2595,3530 2669.02,3455.98 U1.39@2794.41,3455.98 ; U1.39@2779.96,3441.54 ccw(c2745.08,3406.65) 2745.08,3455.98 ccw(c2745.08,3505.31) U1.39@2779.96,3470.43
PGD: J3.4 U1.40 | length 435
  Bottom Layer w30: J3.4 2620,3430 2694.02,3355.98 U1.40@2794.41,3355.98 ; J3.4@2569.02,3415.55 cw(c2603.9,3380.67) 2603.9,3430 cw(c2603.9,3479.33) J3.4@2569.02,3444.45 ; U1.40@2779.96,3341.54 ccw(c2745.08,3306.65) 2745.08,3355.98 ccw(c2745.08,3405.31) U1.40@2779.96,3370.43
PWM: AND.2 AND.4 J7.1 U1.17 | length 1797.8
  Bottom Layer w30: U1.17@3395,4955 3455,4955 3715,5215 3975,5215 4095,5335 ; U1.17@3409.45,4940.55 cw(c3444.33,4905.67) 3444.33,4955 cw(c3444.33,5004.33) U1.17@3409.45,4969.45 ; AND.4@4080.55,5383.48 cw(c4045.67,5348.6) 4095,5348.6 cw(c4144.33,5348.6) AND.4@4109.45,5383.48 ; AND.4 4095,5335 ; AND.2@4280.55,5426.52 ccw(c4245.67,5461.4) 4295,5461.4 ccw(c4344.33,5461.4) AND.2@4309.45,5426.52 ; J7.1@4495.98,5540.55 ccw(c4461.1,5505.67) 4461.1,5555 ccw(c4461.1,5604.33) J7.1@4495.98,5569.45 ; J7.1 4370,5555 4295,5480 AND.2 4294.61,5405 4224.17,5334.57 4165.39,5334.57 4164.96,5335 4095,5335
RS: J2.4 U1.38 | length 775.3
  Bottom Layer w30: J2.4 2620,3605 2669.02,3555.98 U1.38@2795,3555.98 ; J2.4@2209.45,3590.55 cw(c2244.33,3555.67) 2244.33,3605 cw(c2244.33,3654.33) J2.4@2209.45,3619.45 ; U1.38@2779.96,3541.54 ccw(c2745.08,3506.65) 2745.08,3555.98 ccw(c2745.08,3605.31) U1.38@2779.96,3570.43
VREFTR: C10.1 R10.2 T2.12 | length 1132.3
  Bottom Layer w30: R10.2@3566.16,3358.56 ccw(c3530,3327.01) 3530,3375 ; R10.2@3566.16,3391.44 cw(c3530,3422.99) 3530,3375 ; R10.2 3530,3375 ; C10.1@3587.32,3007.68 cw(c3544.64,3050.36) 3544.64,2990 cw(c3544.64,2929.64) 3587.32,2972.32 cw(c3544.64,2929.64) 3605,2929.64 cw(c3665.36,2929.64) C10.1@3622.68,2972.32 ; 3664.05,2845.95 cw(c3601.42,2783.31) T2.12@3690,2783.31 ; T2.12 3710,2800 3605,2905 C10.1 3535,2990 3495,3030 3495,3340 3530,3375
pads on no net: AND.8 AND.9 AND.10 AND.11 AND.12 AND.13 HOLE1.1 HOLE2.1 HOLE3.1 HOLE4.1 J2.0 J2.7 J2.8 J2.9 J2.10 NOT.5 NOT.6 NOT.8 NOT.9 NOT.10 NOT.11 NOT.12 NOT.13 OR.8 OR.9 OR.10 OR.11 OR.12 OR.13 SW1.3 T2.0 T2.2 T2.3 T2.4 T2.5 T2.6 T2.7 U1.5 U1.6 U1.7 U1.8 U1.9 U1.10 U1.13 U1.14 U1.15 U1.16 U1.18 U1.20 U1.21 U1.22 U1.23 U1.24 U1.25 U1.26 U1.27 U1.29 U1.30
copper on no net: | length 1790.3
  Top Layer w50: 3695,2501.85 3795,2261.69 ; 3719.25,2480.72 ccw(c3764.26,2462.17) 3719.32,2443.46 ; 3795,2501.85 3895,2261.69 ; 3819.25,2480.72 ccw(c3864.26,2462.17) 3819.32,2443.46 ; 3895,2501.85 3995,2261.69 ; 3919.25,2480.72 ccw(c3964.26,2462.17) 3919.32,2443.46
  Bottom Layer w50: 3695,2501.85 3795,2261.69 ; 3719.25,2480.72 ccw(c3764.26,2462.17) 3719.32,2443.46 ; 3795,2501.85 3895,2261.69 ; 3819.25,2480.72 ccw(c3864.26,2462.17) 3819.32,2443.46 ; 3895,2501.85 3995,2261.69 ; 3919.25,2480.72 ccw(c3964.26,2462.17) 3919.32,2443.46

## Polygon pours and split planes (outlines as drawn)
+5V on Bottom Layer "Bottom Layer-No Net" (solid, pour order 12): 3395,6180 3395,6680 3095,6680 2503.48,6680 2474.03,6680 2474.03,6637.71 2478.39,6130 3095,6130 3095,6180
+5V on Bottom Layer "Bottom Layer-No Net" (solid, shelved, pour order 14): 3395,6180 3395,6055 3095,6055 3095,6180 3245,6230
GND on Bottom Layer "Bottom Layer-No Net" (solid, pour order 10): 4800,2900 cw(c4812.07,2912.07) 4795,2912.07 4795,6855 1995,6855 1995,6850 1995,2876.07 2015.19,2875.35 4102.48,2874.82 4795,2875
+5V on Top Layer "Bottom Layer-No Net" (solid, pour order 16): 3395,6180 3395,6680 3095,6680 2695,6680 2495,6680 2350,6680 2350,6400 2350,6130 2495,6130 2695,6130 3095,6130 3108.28,6130.69 3395,6130

## Keep-outs
Keep-Out Layer:
  lines w10: 1995,1655 4795,1655 4795,6855 1995,6855 1995,1655

## Other copper
Top Layer:
  text "Ondulador" at 2400,5750 h100 r90
Bottom Layer:
  text "Ondulador" at 2395,6580 h100 r90
Multi-Layer:
  circle w10: c7475,1540 r40.31
  lines w10: 2075,1550 2270,1550 ; 2165,1490 2170,1490 2170,1620 ; 7415,1540 7535,1540 ; 7475,1470 7475,1605

## Silkscreen, mask and mechanical layers (free items; w line width, h text height)
Top Overlay:
  lines w10: 4445,5355 4445,6180 ; 4620,5795 4735,5795
  text "GND" at 4620,5855 h40
  text "PWM" at 4620,5730 h40
  text "P" at 4620,5630 h40
  text "PWM" at 4620,5530 h40

## Dimensions
4855,1650 to 4850,6850 on Top Overlay